# Altium PCB bms_v2.PcbDoc
Units mil, origin at the board's own origin, x right, y up, seen from the top; angles counter-clockwise.
Board outline 6000 x 4000 mil, 2 copper layers (Top Layer, Bottom Layer); 43 components, 47 nets, 140 pads, 0 vias.
Unrouted connection lines stored in the file: 2.
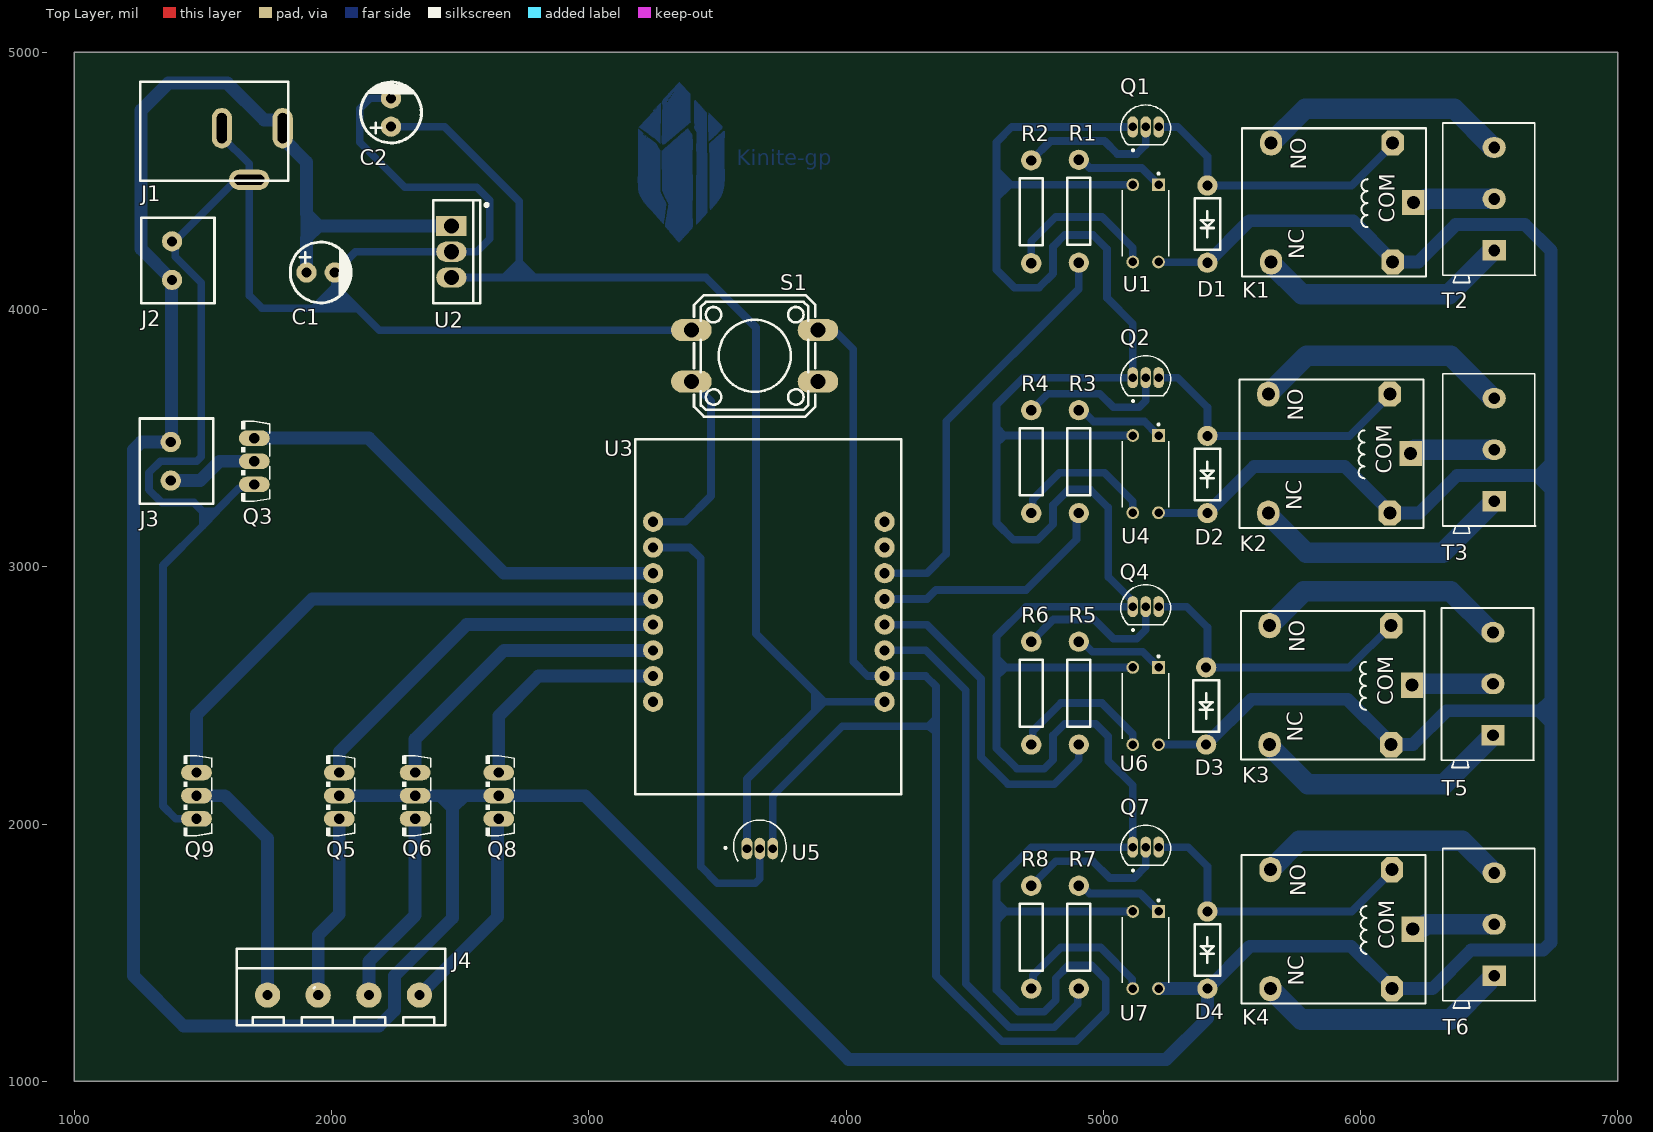
[diagram p0: Top Layer view]
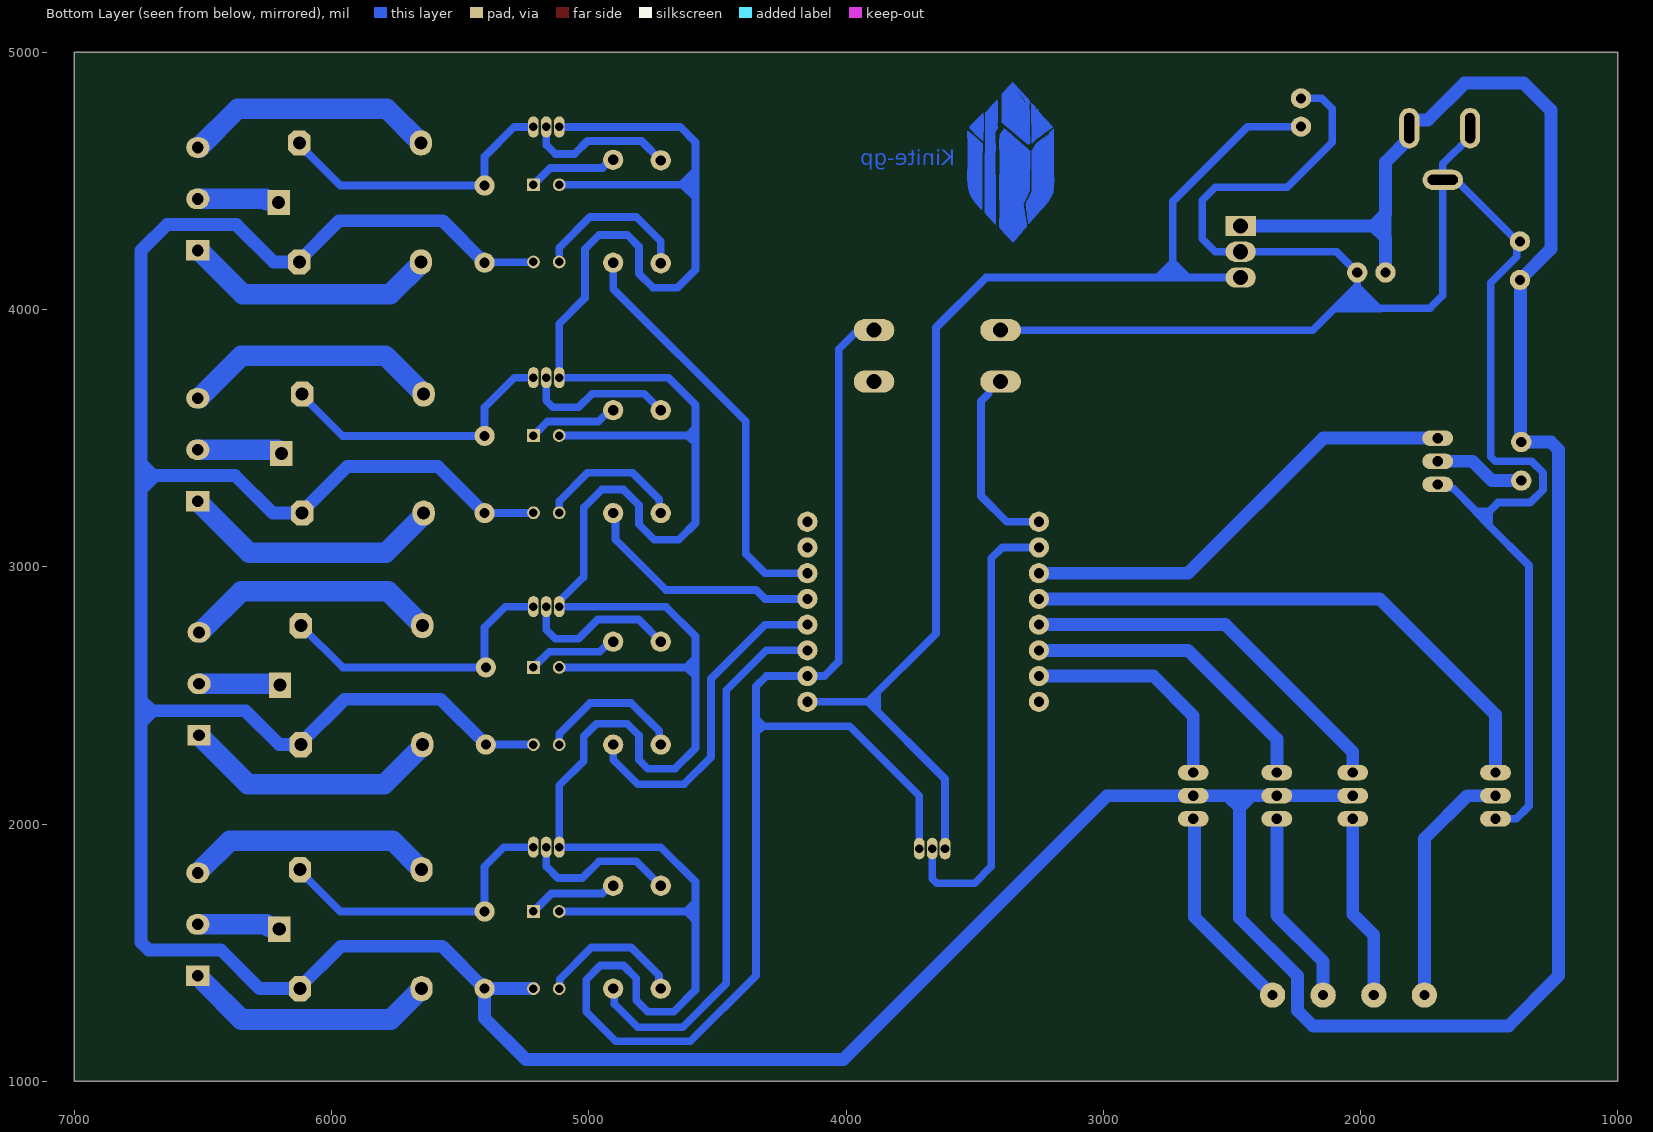
[diagram p1: Bottom Layer view, seen from below]

## Layer stack, top to bottom
Top Solder: solder mask 0.4, Solder Resist, Dk 3.5
Top Layer: signal copper 1.4
Dielectric 1: dielectric 12.6, FR-4, Dk 4.8
Bottom Layer: signal copper 1.4
Bottom Solder: solder mask 0.4, Solder Resist, Dk 3.5

## Board outline
1000,1000 7000,1000 7000,5000 1000,5000

## Design rules (kind name [scope] priority, off if disabled: settings)
Clearance [All] p1: gap=10 ignorepadtopadclearanceinfootprint=FALSE except(0: Arc-Hole Track-Hole SMDPad-Hole THPad-Hole Via-Hole Fill-Hole Poly-Hole Region-Hole Text-Hole)
PolygonConnect [All] p1: connectstyle=Relief reliefconductorwidth=10 reliefentries=4 polygonreliefangle="90 Angle" airgapwidth=10
RoutingVias [All] p1: holewidth=28 width=50 viastyle="Through Hole" minholewidth=28 minwidth=50 maxholewidth=28 maxwidth=50
SolderMaskExpansion [All] p1: expansion=4 istentingtop=FALSE
UnRoutedNet [All] p1: checkbadconnections=TRUE
Width [All] p1: maxlimit=80 minlimit=10 preferedwidth=25
29 further rules are at their usual default settings.

## Components (designator, comment, footprint, x,y, rotation, side; value= is the part's Value field where it differs from the comment)
C1 "100uF/16V" 100uF/16V 1957.64,4144.02 r0 top
C2 "100uF/16V" 100uF/16V 2231.32,4765.9 r90 top
D1 "1N4007" 1N4007 5405,4332.05 r180 top
D2 "1N4007" 1N4007 5405,3358.7 r180 top
D3 "1N4007" 1N4007 5400,2458.7 r180 top
D4 "1N4007" 1N4007 5405,1510 r180 top
J1 "VCC +12" JACK_P4 1544.39,4692.5 r180 top
J2 "15EDGVC-3.81-2P" 15EDGVC-3.81-2P 1400,4190 r0 top
J3 "15EDGVC-3.81-2P" 15EDGVC-3.81-2P 1395,3410 r0 top
J4 "BORNE-5.00-4P" BORNE-5.00-4P 2036.57,1366.4 r270 top
K1 "Relay 18.85x15.35x15.70" "Relay 18.85x15.35x15.70" 9076.97,-459.61 r90 top
K2 "Relay 18.85x15.35x15.70" "Relay 18.85x15.35x15.70" 9066.26,-1435.91 r90 top
K3 "Relay 18.85x15.35x15.70" "Relay 18.85x15.35x15.70" 9071.26,-2335.91 r90 top
K4 "Relay 18.85x15.35x15.70" "Relay 18.85x15.35x15.70" 9074.41,-3284.61 r90 top
Q1 "2N3904" TO92127P495H495-3 5165,4710 r0 top
Q2 "2N3904" TO92127P495H495-3 5165,3735 r0 top
Q3 "BD139" TO126AV 1649.91,3410 r90 top
Q4 "2N3904" TO92127P495H495-3 5165,2845 r0 top
Q5 "BD139" TO126AV 1980,2110 r90 top
Q6 "BD139" TO126AV 2275,2110 r90 top
Q7 "2N3904" TO92127P495H495-3 5165,1910 r0 top
Q8 "BD139" TO126AV 2600,2110 r90 top
Q9 "BD139" TO126AV 1425,2110 r90 top
R1 "220 ohm" RESISTOR_PTH_10mm 4905,4382.05 r90 top
R2 "510 ohm" RESISTOR_PTH_10mm 4720,4380 r90 top
R3 "220 ohm" RESISTOR_PTH_10mm 4905,3408.7 r90 top
R4 "510 ohm" RESISTOR_PTH_10mm 4720,3408.7 r90 top
R5 "220 ohm" RESISTOR_PTH_10mm 4905,2508.7 r90 top
R6 "510 ohm" RESISTOR_PTH_10mm 4720,2508.7 r90 top
R7 "220 ohm" RESISTOR_PTH_10mm 4905,1560 r90 top
R8 "510 ohm" RESISTOR_PTH_10mm 4720,1560 r90 top
S1 "PUSH_BUTTON_12X12" PUSH_BUTTON_12X12_BLUE 3645,3820 r0 top
T2 "3Pin_Terminal" 3Pin_Terminal 7670.24,1659.17 r90 top
T3 "3Pin_Terminal" 3Pin_Terminal 7670.24,684.17 r90 top
T5 "3Pin_Terminal" 3Pin_Terminal 7665.24,-225.83 r90 top
T6 "3Pin_Terminal" 3Pin_Terminal 7670.24,-1160.83 r90 top
U1 "PC817X3NSZ1B" DIP762W50P254L495H455Q4 5165,4335 r270 top
U2 "L7805" L7805_180 2487.2,4225 r270 top
U3 "Wemos mini d1" PCBComponent_1 3200,2150 r0 top
U4 "PC817X3NSZ1B" DIP762W50P254L495H455Q4 5165,3360 r270 top
U5 "LM35DZ/NOPB" TO92127P521H735-3 3665,1935 r0 top
U6 "PC817X3NSZ1B" DIP762W50P254L495H455Q4 5165,2458.7 r270 top
U7 "PC817X3NSZ1B" DIP762W50P254L495H455Q4 5165,1510 r270 top

## Footprints (in the part's own frame and the unit in brackets; to place one, negate y for a bottom-side part, rotate by r counter-clockwise, add the part's x,y. Pads: shape width x height; smd on the part's side, far side on the other; paste and mask are expansions set on the pad)
1N4007 [mm] "Rectifier Diode 1000V 1A DO-41"
  round 2 hole 1: 1(0,-3.81) 2(0,3.81)
  silkscreen extent -1.27,-2.54 1.27,2.54, body extent -1.35,-4.24 1.35,4.24, height 3.35
3Pin_Terminal [mil]
  rect 80x90 hole 46: 1(2570.83,1150.24)
  oval 80x90 hole 46: 2(2770.83,1150.24) 3(2970.83,1150.24)
  silkscreen extent 2446,990 3066,1350, body extent 2443,993 3066,1350, height 503
15EDGVC-3.81-2P [mm]
  round 2 hole 1 paste-2539.97: 1(-0.508,1.905) 2(-0.508,-1.905)
  silkscreen extent -3.56,-4.19 3.68,4.22, body extent -3.52,-4.21 3.68,4.21, height 9.2
100uF/16V [mm] "ELECTROLYTIC CAPACITOR 6mm"
  round 2 hole 1: 1(1.397,0) 2(-1.397,0)
  silkscreen extent -3,-3 3,3, body extent -3.14,-3.14 3.15,3.14, height 11
BORNE-5.00-4P [mm]
  round 2.5 hole 1: 1(0.798,7.754) 2(0.798,2.754) 3(0.798,-2.246) 4(0.798,-7.246)
  silkscreen extent -3.79,-10.29 3.79,10.29, body extent -3.82,-10.29 3.78,10.31, height 10.02
DIP762W50P254L495H455Q4 [mm]
  rect 1.26x1.26 / inner round 1.26 / far side rect 1.26x1.26 hole 0.84: 1(-3.81,1.27)
  round 1.26 hole 0.84: 2(-3.81,-1.27) 3(3.81,-1.27) 4(3.81,1.27)
  silkscreen extent -5.01,-2.3 3.25,2.3, body extent -3.94,-2.3 3.94,2.3, height 4.55
JACK_P4 [mm]
  oval 2x4 hole 1 slot 3 at 90 deg: 1(-6.747,-0.318) 2(-0.747,-0.318)
  oval 4x2 hole 1 slot 3 at 0 deg: 3(-3.446,4.783)
  silkscreen extent -7.3,-4.89 7.3,4.89, body extent -7.27,-4.92 7.23,4.88, height 11.38
L7805_180 [mm] "TO-220"
  rect 2x3 hole 1.5: 1(-2.54,-0.541)
  oval 2x3 hole 1.5: 2(0.01,-0.541) 3(2.56,-0.541)
  silkscreen extent -5.08,-2.32 5.08,3.03, body extent -5.1,-2.19 5.1,2.31, height 19.31
PCBComponent_1 [mm]
  round 2 hole 1: 3V3(1.27,8.255) 5V(24.13,8.255) A0(1.27,23.495) D0(1.27,20.955) D1(24.13,20.955) D2(24.13,18.415) D3(24.13,15.875) D4(24.13,13.335) D5(1.27,18.415) D6(1.27,15.875) D7(1.27,13.335) D8(1.27,10.795) GND(24.13,10.795) RST(1.27,26.035) RX(24.13,23.495) TX(24.13,26.035)
  silkscreen extent -0.51,-0.89 25.78,34.16, body extent -0.27,-0.59 25.53,33.86, height 7.9
PUSH_BUTTON_12X12_BLUE [mm]
  oval 4x2.2 hole 1.5: 1(-6.251,2.54) 1(6.251,2.54) 2(-6.251,-2.54) 2(6.251,-2.54)
  silkscreen extent -5.99,-6 5.99,6, body extent -6.77,-6.01 6.65,6, height 8.84
"Relay 18.85x15.35x15.70" [mm]
  rect 2.5x2.2 hole 1.3: 1(123.848,72.93)
  oval 2.5x2.2 hole 1.3: 2(117.973,86.98) 3(129.723,86.98)
  oct 2.5x2.2 hole 1.3: 4(117.973,74.98) 5(129.723,74.98)
  silkscreen extent 116.52,71.68 131.17,89.83, body extent 116.48,71.24 131.48,89.94, height 15.7
RESISTOR_PTH_10mm [mm]
  round 2 hole 1: 1(-5.08,0) 2(5.08,0)
  silkscreen extent -3.3,-1.14 3.3,1.14, body extent -5.33,-1.14 5.33,1.15, height 2.4
TO126AV [mil]
  oval 60x120 hole 40: B(90,-50) C(0,-50) E(-90,-50)
  silkscreen extent -155,-110 155,0, body extent -150,-60 150,45, height 520
TO92127P495H495-3 [mm]
  oval 1.04x2.08 hole 0.84: 1(-1.27,0) 2(0,0) 3(1.27,0)
  silkscreen extent -2.48,-2.4 2.48,2.16, body extent -2.28,-1.55 2.28,2.28, height 20.44
TO92127P521H735-3 [mm]
  oval 1.07x2.14 hole 0.85: 1(-1.27,-0.775) 2(0,-0.775) 3(1.27,-0.775)
  silkscreen extent -3.5,-2.08 2.6,2.04, body extent -2.4,-1.53 2.4,2.4, height 7.74

## Part data
C1 C2: "Electrolytic Capacitor 100uF/16V"
D1 D2 D3 D4: "Rectifier Diode 1000V 1A DO-41", JLCPCB PN=C3033995, ComponentLink1Description=Datasheet, ComponentLink1URL=https://www.mouser.com/datasheet/2/849/1n4001-2577232.pdf, Digikey PN=4617-1N4007TB-ND, Mouser PN=637-1N4007
J1: library part JACK_P4, "9V Battery Connector Jack P4."
J2 J3: "Female Connector 15EDGVC-2P, pitch 3.81mm.", JLCPCB PN=C8396
J4: "Borne 4 Vias, Pitch 5mm.", JLCPCB PN=C2915641
Q1 Q2 Q4 Q7: "TRANS NPN 40V 200MA TO92-3", Package="TO-226-3 Rectron", Availability="In Stock", Check_prices=https://www.snapeda.com/parts/2N3904/Rectron/view-part/?ref=eda, MF=Rectron, MP=2N3904, Price=None, Purchase-URL=https://pricing.snapeda.com/search/part/2N3904/?ref=eda, SnapEDA_Link=https://www.snapeda.com/parts/2N3904/Rectron/view-part/?ref=snap
Q3 Q5 Q6 Q8 Q9: "Bipolar (BJT) Transistor NPN 80 V 1.5 A - 1.25 W Through Hole TO-126-3", Package="TO-126 STMicroelectronics", Check_prices=https://www.snapeda.com/parts/BD139/Onsemi/view-part/?ref=eda, MF=ON, MP=BD139, SnapEDA_Link=https://www.snapeda.com/parts/BD139/Onsemi/view-part/?ref=snap
R1 R2 R3 R4 R5 R6 R7 R8: library part RESISTOR_10mm, "Generic Resistor 10mm."
S1: "Push Button Tactile Switch PTH 4 Pins 12x12mm.", JLCPCB PN=C84931, Mouser PN=992-BUTT-12-5
U1 U4 U6 U7: "Optoisolator Transistor Output - 1 Channel 4-DIP", Package="DIP-4 Sharp Microelectronics", Availability="In Stock", Check_prices=https://www.snapeda.com/parts/PC817X3NSZ1B/Sharp+Microelectronics/view-part/?ref=eda, MF="Sharp Microelectronics", MP=PC817X3NSZ1B, Price=None, Purchase-URL=https://pricing.snapeda.com/search/part/PC817X3NSZ1B/?ref=eda, SnapEDA_Link=https://www.snapeda.com/parts/PC817X3NSZ1B/Sharp+Microelectronics/view-part/?ref=snap
U2: "IC REG LINEAR 5V 1.5A TO220AB", JLCPCB PN PTH=C347289, JLCPCB PN SMD=C15077, ComponentLink1Description=Datasheet, ComponentLink1URL=https://www.mouser.com/datasheet/2/389/l78-1849632.pdf, Digikey PN=497-1443-5-ND, Mouser PN=511-L7805CV
U3: library part "wemos mini d1"
U5: "Temperature Sensor Analog, Local 0Â°C ~ 100Â°C 10mV/Â°C TO-92-3", Package="E-PKG AXIAL-LEADED-2 ON Semiconductor", Availability="In Stock", Check_prices=https://www.snapeda.com/parts/LM35DZ/Texas+Instruments/view-part/?ref=eda, MF="Texas Instruments", MP=LM35DZ, Price=None, Purchase-URL=https://pricing.snapeda.com/search/part/LM35DZ/?ref=eda, SnapEDA_Link=https://www.snapeda.com/parts/LM35DZ/Texas+Instruments/view-part/?ref=snap

## Nets (pads, with @x,y where several pads share a name; then routed paths per layer and width w, separated by ;. In a path a pad name is that pad's centre, name@x,y a point inside that pad or via, vN(x,y) a via of type N, cw(c..) or ccw(c..) an arc to the next point about the centre after c; other vN are vias at no path point)
+5: C2.2 U2.3 U3.5V U5.1 | length 4663.8
  Bottom Layer w30: C2.2 2439.1,4710.9 2730,4420 2730,4184.21 ; U2.3 2670,4124.21 2730,4184.21 ; U5.1 3615,2175 3915,2475 ; U3.5V 3915,2475 ; 2730,4184.21 2790,4124.21 3455.79,4124.21 3650,3930 3650,2740 3915,2475
+12: C1.2 D1.2 D2.2 D3.2 D4.2 J1.1 J2.2 J3.1 K1.4 K2.4 K3.4 K4.4 Q5.C Q6.C Q8.C U1.4 U2.1 U4.4 U6.4 U7.4 | length 21077.6
  Bottom Layer w30: J3.1 J3.1@1377.5,3487.5 ; J2.2@1377.5,4112.5 J2.2 ; J1.1@1810,4665.63 J1.1 J1.1@1810,4744.37 ; 1902.64,4372.36 1902.64,4375 ; U6.4 D3.2 ; U4.4 5215.65,3209.35 5404.35,3209.35 D2.2 ; U1.4 5216.48,4183.52 5403.52,4183.52 D1.2
  Bottom Layer w50: J3.1 1260,3485 1230,3455 1230,1410 1425,1215 2185,1215 2245,1275 2245,1410 2470,1635 2470,2110 ; J3.1@1377.5,3487.5 J2.2@1377.5,4112.5 ; J2.2 1260,4235 1260,4775 1365,4880 1595,4880 1738.13,4736.87 J1.1@1780.56,4736.87 ; J1.1@1810,4665.63 1902.64,4572.99 1902.64,4375 ; C1.2 1902.64,4277.64 1950,4325 ; 1902.64,4372.36 1950,4325 ; Q5.C Q6.C 2470,2110 ; U2.1 1950,4325 ; U7.4 D4.2 ; D3.2 5576.3,2485 5948.9,2485 6119.29,2314.61 K3.4 6203.7,2308.7 6335,2440 6740,2440 ; D2.2 5586.3,3390 5938.9,3390 6114.29,3214.61 K2.4 6228.7,3208.7 6375,3355 6685,3355 6740,3300 ; D1.2 5567.95,4345 5970.91,4345 6125,4190.91 K1.4 6225,4185 6370,4330 6640,4330 6740,4230 6740,3300 ; 2470,2110 Q8.C 2985,2110 4010,1085 5245,1085 5405,1245 D4.2 ; D4.2 5570,1525 5963.35,1525 6122.44,1365.91 K4.4 6280,1360 6430,1510 6710.71,1510 6740,1539.29 6740,2440 ; 6740,2440 6740,3300
channel1: R1.1 U3.D1 | length 1616.4
  Bottom Layer w30: U3.D1 4315,2975 4390,3050 4390,3565 4905,4080 R1.1
channel2: R3.1 U3.D2 | length 948.1
  Bottom Layer w30: U3.D2 4315,2875 4350,2910 4700,2910 4895.67,3105.67 4895.67,3199.37 R3.1
channel3: R5.1 U3.D3 | length 1288.5
  Bottom Layer w30: U3.D3 4315,2775 4525,2565 4525,2260 4630,2155 4810,2155 4904.69,2249.69 4904.69,2308.39 R5.1
channel4: R7.1 U3.D4 | length 2124
  Bottom Layer w30: U3.D4 4310,2675 4465,2520 4465,1380 4635,1210 4810,1210 4900.63,1300.63 4900.63,1355.63 R7.1
Fan: Q3.B U3.D0 | length 1767.6
  Bottom Layer w50: Q3.B 2145,3500 2670,2975 U3.D0
GND: C1.1 C2.1 J1.2 J1.3 J2.1 Q1.1 Q2.1 Q3.E Q4.1 Q7.1 Q9.E S1.1 U1.2 U2.2 U3.GND U4.2 U5.3 U6.2 U7.2 | length 22646.4
  Bottom Layer w30: J2.1 1392.2,4252.8 1392.2,4205.56 1493.79,4103.97 1493.79,3427.57 1476.21,3410 1335,3410 1290,3365 1290,3300 1340,3250 1465,3250 1500,3215 ; J2.1@1390.75,4265 1629.96,4504.21 J1.3 ; Q9.E 1395,2020 1345,2070 1345,3005 1500,3160 1500,3215 ; Q9.E@1496.88,2020 Q9.E@1510.74,2006.14 ; J1.2 1573.78,4672.38 1680.08,4566.08 J1.3 ; Q3.E 1661.79,3320 1646.79,3305 1640,3305 1550,3215 1500,3215 ; 2011.17,4086.17 1930,4005 1730,4005 1680.08,4054.92 J1.3 ; C2.1 2150.9,4820.9 2110,4780 2110,4650 2285,4475 2565,4475 2615,4425 2615,4275 2564.61,4224.61 U2.2 2093.23,4224.61 C1.1 2012.64,4092.36 2185,3920 S1.1@3398.9,3920 ; U5.3 3715,2110 3985,2380 4350,2380 ; S1.1@3891.1,3920 3901.93,3909.17 3964.27,3909.17 4028.3,3845.14 4028.3,2631.7 4085,2575 U3.GND 4310,2575 4350,2535 4350,2380 ; U7.2 4620,1660 4585,1695 ; U6.2 4621.3,2608.7 4585,2645 ; U4.2 4615,3510 4585,3540 ; U1.2 4640,4485 4585,4540 ; Q1.1 4645,4710 4585,4650 4585,4540 ; 4350,2380 4350,1410 4605,1155 4895,1155 5010,1270 5010,1395 4955,1450 4865,1450 4815,1400 4815,1315 4770,1270 4670,1270 4585,1355 4585,1695 ; 4585,1695 4585,1775 4720,1910 Q7.1 5115,2150 5020,2245 5020,2340 4970,2390 4850,2390 4805,2345 4805,2250 4770,2215 4665,2215 4585,2295 4585,2645 ; 4585,2645 4585,2730 4700,2845 Q4.1 5115,2865.47 5020,2960.47 5020,3230 4950,3300 4865,3300 4805,3240 4805,3165.27 4744.73,3105 4650,3105 4585,3170 4585,3540 ; 4585,3540 4585,3630 4690,3735 Q2.1 5115,3945 5015,4045 5015,4235 4960,4290 4850,4290 4805,4245 4805,4140 4750,4085 4655,4085 4585,4155 4585,4540
NetD1_1: D1.1 K1.5 Q1.3 | length 1142.6
  Bottom Layer w30: Q1.3 5290,4710 5405,4595 D1.1 5965.35,4482.05 6125,4641.69 K1.5
NetD2_1: D2.1 K2.5 Q2.3 | length 1129
  Bottom Layer w30: Q2.3 5290,3735 5405,3620 D2.1 5957.6,3508.7 6114.29,3665.39 K2.5
NetD3_1: D3.1 K3.5 Q4.3 | length 1168.2
  Bottom Layer w30: Q4.3 5325,2845 5405,2765 5405,2613.7 D3.1 5956.69,2608.7 K3.5
NetD4_1: D4.1 K4.5 Q7.3 | length 1184.3
  Bottom Layer w30: Q7.3 5330,1910 5405,1835 D4.1 5965.75,1660 6122.44,1816.69 K4.5
NetJ3_2: J3.2 Q3.C | length 356
  Bottom Layer w50: J3.2 1489.5,3335 1564.5,3410 Q3.C
NetJ4_1: J4.1 Q8.E | length 812.9
  Bottom Layer w50: J4.1 2644.99,1638.15 2644.99,2015.38 2649.61,2020 Q8.E
NetJ4_2: J4.2 Q6.E | length 759.6
  Bottom Layer w50: J4.2 2144.99,1464.99 2325,1645 Q6.E
NetJ4_3: J4.3 Q5.E | length 718.9
  Bottom Layer w50: J4.3 1948.14,1568.14 2030,1650 Q5.E
NetJ4_4: J4.4 Q9.C | length 953.9
  Bottom Layer w50: Q9.C 1585,2110 1751.29,1943.71 J4.4
NetK1_1: K1.1 T2.2 | length 318.4
  Bottom Layer w80: K1.1 6205.71,4422.21 6209.02,4425.51 6250.87,4425.51 6255.36,4430 T2.2@6515,4430
NetK1_2: K1.2 T2.1 | length 993.1
  Bottom Layer w30: K1.2@5652.56,4179.09 K1.2 ; T2.1@6515,4230 T2.1
  Bottom Layer w80: K1.2@5652.56,4179.09 5771.65,4060 6345,4060 T2.1@6515,4230
NetK1_3: K1.3 T2.3 | length 979.4
  Bottom Layer w80: K1.3 5784.96,4780 6365,4780 T2.3@6515,4630
NetK2_1: K2.1 T3.2 | length 331.2
  Bottom Layer w30: K2.1 K2.1@6210,3455
  Bottom Layer w80: K2.1@6210,3455 T3.2
NetK2_2: K2.2 T3.1 | length 1028.1
  Bottom Layer w30: K2.2@5641.85,3202.8 K2.2
  Bottom Layer w80: K2.2@5641.85,3202.8 5789.65,3055 6320,3055 T3.1
NetK2_3: K2.3 T3.3 | length 1008.1
  Bottom Layer w30: T3.3@6515,3655 T3.3
  Bottom Layer w80: K2.3 5790.55,3820 6350,3820 T3.3@6515,3655
NetK3_1: K3.1 T5.2 | length 317.1
  Bottom Layer w30: K3.1 K3.1@6205,2545
  Bottom Layer w80: K3.1@6205,2545 T5.2
NetK3_2: K3.2 T5.1 | length 1014
  Bottom Layer w30: K3.2@5646.85,2302.8 K3.2
  Bottom Layer w80: K3.2@5646.85,2302.8 5794.65,2155 6325,2155 T5.1
NetK3_3: K3.3 T5.3 | length 992.2
  Bottom Layer w30: K3.3 K3.3@5648.41,2772.85 ; T5.3@6510,2745 T5.3
  Bottom Layer w80: K3.3@5648.41,2772.85 5648.41,2776.97 5649.91,2778.47 5654.02,2778.47 5780.55,2905 6350,2905 T5.3@6510,2745
NetK4_1: K4.1 T6.2 | length 328.1
  Bottom Layer w80: K4.1 6203.15,1597.21 6206.46,1600.51 6243.83,1600.51 6253.32,1610 T6.2
NetK4_2: K4.2 T6.1 | length 993.1
  Bottom Layer w30: T6.1@6495,1385 6495,1390 6515,1410 T6.1
  Bottom Layer w80: K4.2 5770,1240 6350,1240 T6.1@6495,1385
NetK4_3: K4.3 T6.3 | length 968.3
  Bottom Layer w80: K4.3 5762.4,1935 6395,1935 T6.3
NetQ1_2: Q1.2 R2.2 | length 581.3
  Bottom Layer w30: R2.2 4795,4655 5005,4655 5055,4605 5130,4605 5165,4640 Q1.2
NetQ2_2: Q2.2 R4.2 | length 594
  Bottom Layer w30: R4.2 4784.37,3673.07 4986.93,3673.07 5040,3620 5140,3620 5165,3645 Q2.2
NetQ4_2: Q4.2 R6.2 | length 616.3
  Bottom Layer w30: R6.2 4806.3,2795 4965,2795 5040,2720 5130,2720 5165,2755 Q4.2
NetQ7_2: Q7.2 R8.2 | length 604.9
  Bottom Layer w30: R8.2 4815,1855 4960,1855 5025,1790 5120,1790 5165,1835 Q7.2
NetR1_2: R1.2 U1.1 | length 350.2
  Bottom Layer w30: R1.2 4914.9,4582.05 4946.94,4550 5150,4550 U1.1
NetR2_1: R2.1 U1.3 | length 624.1
  Bottom Layer w30: R2.1 4720,4265 4815,4360 4995,4360 5115,4240 U1.3
NetR3_2: R3.2 U4.1 | length 350.9
  Bottom Layer w30: R3.2 4918.19,3608.7 4961.89,3565 5160,3565 U4.1
NetR4_1: R4.1 U4.3 | length 577.4
  Bottom Layer w30: R4.1 4726.51,3215.21 4726.51,3261.51 4830,3365 5005,3365 5115,3255 U4.3
NetR5_2: R5.2 U6.1 | length 351.4
  Bottom Layer w30: R5.2 4918.19,2708.7 4956.89,2670 5153.7,2670 U6.1
NetR6_1: R6.1 U6.3 | length 579.9
  Bottom Layer w30: R6.1 4726.51,2315.21 4726.51,2361.51 4835,2470 4995,2470 5115,2350 U6.3
NetR7_2: R7.2 U7.1 | length 351.4
  Bottom Layer w30: R7.2 4916.94,1760 4946.94,1730 5145,1730 U7.1
NetR8_1: R8.1 U7.3 | length 574.4
  Bottom Layer w30: R8.1 4727.16,1367.16 4727.16,1412.16 4835,1520 4990,1520 5113.14,1396.86 5113.14,1361.86 U7.3
RGBBlue: Q8.B U3.D8 | length 884.2
  Bottom Layer w50: Q8.B 2650,2420 2805,2575 U3.D8
RGBControl: Q9.B U3.D5 | length 2186.4
  Bottom Layer w50: Q9.B 1475,2425 1925,2875 U3.D5
RGBGreen: Q6.B U3.D7 | length 1197.9
  Bottom Layer w50: Q6.B 2325,2330 2670,2675 U3.D7
RGBRed: Q5.B U3.D6 | length 1505
  Bottom Layer w50: Q5.B 2030,2280 2525,2775 U3.D6
RST: S1.2 U3.RST | length 754.7
  Bottom Layer w30: U3.RST 3375,3175 3475,3275 3475,3643.9 3445.17,3673.73 3445.17,3693.85 3419.01,3720 S1.2@3398.9,3720
Sensor: U3.A0 U5.2 | length 1787.4
  Bottom Layer w30: U3.A0@3254.37,3070.63 U3.A0 3392.43,3075 3435,3032.43 3435,1835 3500,1770 3647.43,1770 3665,1787.57 U5.2
pads on no net: U3.3V3 U3.RX U3.TX

## Other copper
Bottom Layer:
  region net +12: 6662.6,2437.4 6740,2360 6740,2514.8
  region net +12: 6660,3355 6685,3355 6740,3300 6740,3435
  region net GND: 4585,3540 4625,3500 4585,3460
  region net GND: 4630,2600 4585,2555 4585,2645
  region net +12: 1880,4398.9 1880,4255 1950,4325
  region: 3282.97,4804.15 3280.79,4801.98 3278.32,4645.1 3240.34,4683.08 3234.76,4683.08 3234.76,4680.82 3195.24,4709.18
  region: 573 vertices and 7 holes, not listed, extent 3190.75,4333.54 3300.95,4701.84
  region: 285 vertices and 5 holes, not listed, extent 3232.8,4651.09 3278.47,4796.81
  region: 294 vertices and 0 holes, not listed, extent 3410.43,4330.64 3460.45,4814.21
  region: 3277.03,4800.44 3277.03,4801.16 3277.75,4801.16 3277.75,4799.71 3277.03,4799.71 3277.03,4797.54 3274.85,4797.54 3274.85,4796.81 3274.12,4796.81 3274.12,4796.09 3273.4,4796.09 3273.4,4795.36 3272.68,4795.36 3272.68,4794.64 3271.95,4794.64 3271.95,4796.09 3272.68,4796.09 3272.68,4796.81 3273.4,4796.81 3273.4,4797.54 3274.12,4797.54 3274.12,4798.26 3274.85,4798.26 3274.85,4798.99 3275.57,4798.99 3275.57,4799.71 3276.3,4799.71 3276.3,4800.44
  region: 3278.47,4801.89 3278.47,4801.16 3277.75,4801.16 3277.75,4801.89
  region: 3278.47,4801.89 3278.47,4802.61 3279.2,4802.61 3279.2,4801.89
  region: 551 vertices and 15 holes, not listed, extent 3284.28,4641.66 3395.93,4883.09
  region: 689 vertices and 0 holes, not listed, extent 3284.28,4261.76 3403.9,4701.84
  region net +5: 2805.28,4110 2655.79,4110 2727.84,4182.05
  region net GND: 4581.25,1696.25 4628.75,1648.75 4581.25,1601.25
  region net GND: 4585,4540 4647.5,4477.5 4585,4415
  region net GND: 1915,3990 2115,3990 2018.83,4086.17 2011.17,4086.17
  region net +12: 2390,2110 2470,2030 2550,2110
  region net GND: 1565,3216.89 1565,3208.7 1510,3150 1500,3208.7
  region net +5: 3915,2475 3915,2485 3865,2535 3865,2420
  region net GND: 4310,2370 4310,2390 4350,2430 4350,2340
  region: 293 vertices and 0 holes, not listed, extent 3464.07,4654.71 3519.18,4764.19
  region: 307 vertices and 0 holes, not listed, extent 3468.43,4388.64 3527.88,4693.14
  text "Kinite-gp" at 3575,4559.99 h60

## Text inside footprints (layer, text, board x,y; h text height)
K1: Top Overlay "NC" at 5782.13,4196.3 h59.06 r90; Top Overlay "NO" at 5789.13,4544.3 h59.06 r90; Top Overlay "COM" at 6133.13,4338.3 h59.06 r90
K2: Top Overlay "NC" at 5771.43,3220 h59.06 r90; Top Overlay "NO" at 5778.43,3568 h59.06 r90; Top Overlay "COM" at 6122.43,3362 h59.06 r90
K3: Top Overlay "NC" at 5776.43,2320 h59.06 r90; Top Overlay "NO" at 5783.43,2668 h59.06 r90; Top Overlay "COM" at 6127.43,2462 h59.06 r90
K4: Top Overlay "NC" at 5779.57,1371.3 h59.06 r90; Top Overlay "NO" at 5786.57,1719.3 h59.06 r90; Top Overlay "COM" at 6130.57,1513.3 h59.06 r90